# Altium PCB PCB1.PcbDoc
Units mm, origin at the board's own origin, x right, y up, seen from the top; angles counter-clockwise.
Board outline 152.4 x 101.6 mm, 2 copper layers (Top Layer, Bottom Layer); 5 components, 5 nets, 16 pads, 2 vias.
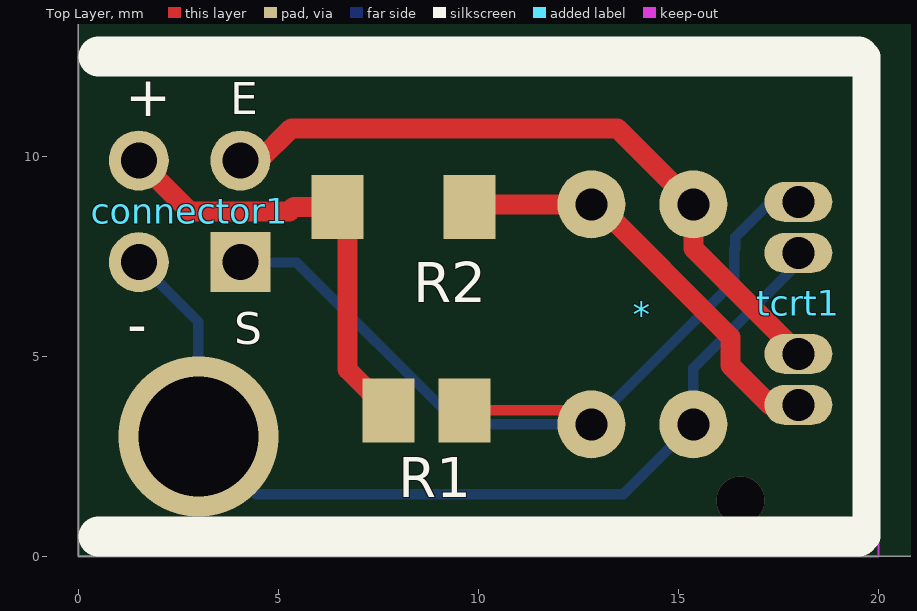
[diagram p0: Top Layer view]
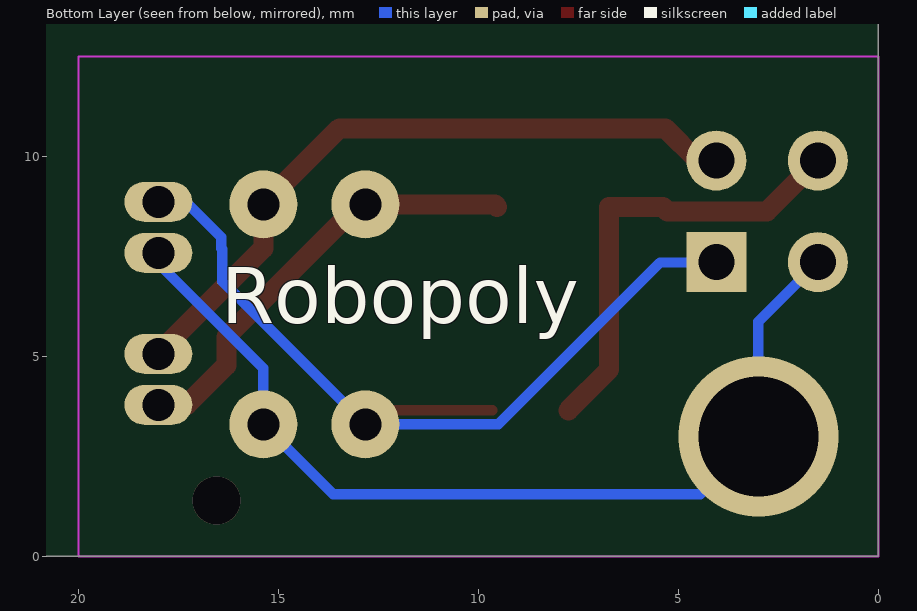
[diagram p1: Bottom Layer view, seen from below]

## Layer stack, top to bottom
Top Layer: signal copper 0.0356
Dielectric: dielectric 0.32, FR-4, Dk 4.8
Bottom Layer: signal copper 0.0356

## Board outline
0,0 152.4,0 152.4,101.6 0,101.6

## Design rules (kind name [scope] priority, off if disabled: settings)
Clearance Clearance_Polygons [InPolygon] p1: gap=0.254
Clearance [All] p2: gap=0.15
HoleSize [All] p1: absolutevalues=TRUE maxlimit=6.2 minlimit=0.3 maxpercent=80.000 minpercent=20.000
MinimumSolderMaskSliver [All] p1 off: minsoldermaskwidth=0.15
MinimumSolderMaskSliver SilkscreenOverComponentPads [All] p2 off: minsoldermaskwidth=0.254
PolygonConnect PolygonConnect_via [All vs IsVia] p1: connectstyle=Direct reliefconductorwidth=0.254 reliefentries=4 polygonreliefangle="90 Angle" airgapwidth=0.254
PolygonConnect [All] p2: connectstyle=Relief reliefconductorwidth=0.254 reliefentries=4 polygonreliefangle="90 Angle" airgapwidth=0.254
RoutingVias [All] p1: holewidth=0.5 width=0.8 viastyle="Through Hole" minholewidth=0.35 minwidth=0.5 maxholewidth=1.5 maxwidth=2
SilkToSilkClearance [All] p1 off: silktosilkclearance=0.254
SolderMaskExpansion [All] p1: expansion=0.1
Width [All] p1: maxlimit=5 minlimit=0.2 preferedwidth=0.5
25 further rules are at their usual default settings.

## Components (designator, comment, footprint, x,y, rotation, side; value= is the part's Value field where it differs from the comment)
* "TCRT 5000" TCRT5000 14.1,6.05 r90 top
connector1 "Header 2X2" "Header 2x2 no silk" 2.781,8.625 r90 top
R1 "Res1" MELF-R2012-0805 8.7,3.65 r0 top
R2 "Res1" PCBComponent_1 8.128,8.739 r0 top
tcrt1 "Header 2" "TCRT 1000" 18,3.786 r90 top

## Footprints (in the part's own frame and the unit in brackets; to place one, negate y for a bottom-side part, rotate by r counter-clockwise, add the part's x,y. Pads: shape width x height; smd on the part's side, far side on the other; paste and mask are expansions set on the pad)
"Header 2x2 no silk" [mm]
  rect 1.5x1.5 hole 0.9: 1(-1.27,-1.27)
  round 1.5 hole 0.9: 2(-1.27,1.27) 3(1.27,-1.27) 4(1.27,1.27)
MELF-R2012-0805 [mm] "Metal Electrode Face (MELF) Resistor; Body 2 x 1.4 mm (LxDia)"
  rect 1.3x1.6 smd: 1(-0.95,0) 2(0.95,0)
PCBComponent_1 [mm]
  rect 1.3x1.6 smd: 1(-1.651,0) 2(1.651,0)
  body extent -1.6,-0.8 1.6,0.8, height 1
TCRT5000 [mm]
  round 1.7 hole 0.8: 1(2.75,1.275) 2(-2.75,1.275) 3(-2.75,-1.275) 4(2.75,-1.275)
"TCRT 1000" [mm]
  oval 1x1.7 hole 0.8: 1(0,0) 2(1.275,0) 3(3.8,0) 4(5.075,0)

## Part data
connector1: "Header, 2-Pin, Dual row"
R1 R2: "Resistor"
tcrt1: library part "TCRT 1000", "Header, 2-Pin"

## Via types
v1: diameter 4, hole 3, Top Layer to Bottom Layer, 1 vias
v2: diameter 1.2, hole 1.2, Top Layer to Bottom Layer, 1 vias

## Nets (pads, with @x,y where several pads share a name; then routed paths per layer and width w, separated by ;. In a path a pad name is that pad's centre, name@x,y a point inside that pad or via, vN(x,y) a via of type N, cw(c..) or ccw(c..) an arc to the next point about the centre after c; other vN are vias at no path point)
ANODE: *.1 R2.2 tcrt1.1 | length 11
  Top Layer w0.5: R2.2@9.528,8.739 9.589,8.8 *.1 12.985,8.8 16.3,5.485 16.3,4.775 17.289,3.786 tcrt1.1
COLL: *.2 connector1.1 R1.2 tcrt1.4 | length 21.9
  Top Layer w0.254: R1.2 12.475,3.65 *.2
  Bottom Layer w0.254: connector1.1@4.064,7.342 5.461,7.342 9.503,3.3 *.2 16.4,6.875 16.4,7.675 16.425,7.7 16.425,7.975 17.311,8.861 tcrt1.4
GND: *.3 connector1.2 tcrt1.3 | length 24.3
  Bottom Layer w0.254: connector1.2@1.524,7.088 1.524,7.342 3,5.866 v1(3,3) 4.45,1.55 13.625,1.55 *.3 15.375,4.7 18,7.325 tcrt1.3
TRANS: *.4 connector1.3 tcrt1.2 | length 17.3
  Top Layer w0.5: connector1.3@4.064,9.882 4.507,9.882 5.325,10.7 13.475,10.7 *.4 15.375,7.7 18,5.075 tcrt1.2
VCC: connector1.4 R1.1 R2.1 | length 11.3
  Top Layer w0.5: connector1.4@1.524,9.882 2.781,8.625 5.275,8.625 5.389,8.739 6.728,8.739 6.728,4.672 R1.1
copper on no net:
  other v2: 16.55,1.4

## Keep-outs
Keep-Out Layer:
  lines w0.05: 0,0 0,12.5 20,12.5 20,0 0,0

## Silkscreen, mask and mechanical layers (free items; w line width, h text height)
Top Overlay:
  lines w0.7: 19.7,0.5 19.7,12.5
  lines w1: 0.5,0.5 19.5,0.5 ; 0.5,12.5 19.5,12.5
  text "E" at 3.8,11.05 h0.8
  text "+" at 1.175,11 h1
  text "-" at 1.225,5.3 h1
  text "S" at 3.9,5.3 h0.8
Bottom Overlay:
  text "Robopoly" at 16.425,5.825 h1.4